# Allegro board OSCILLATOR.brd
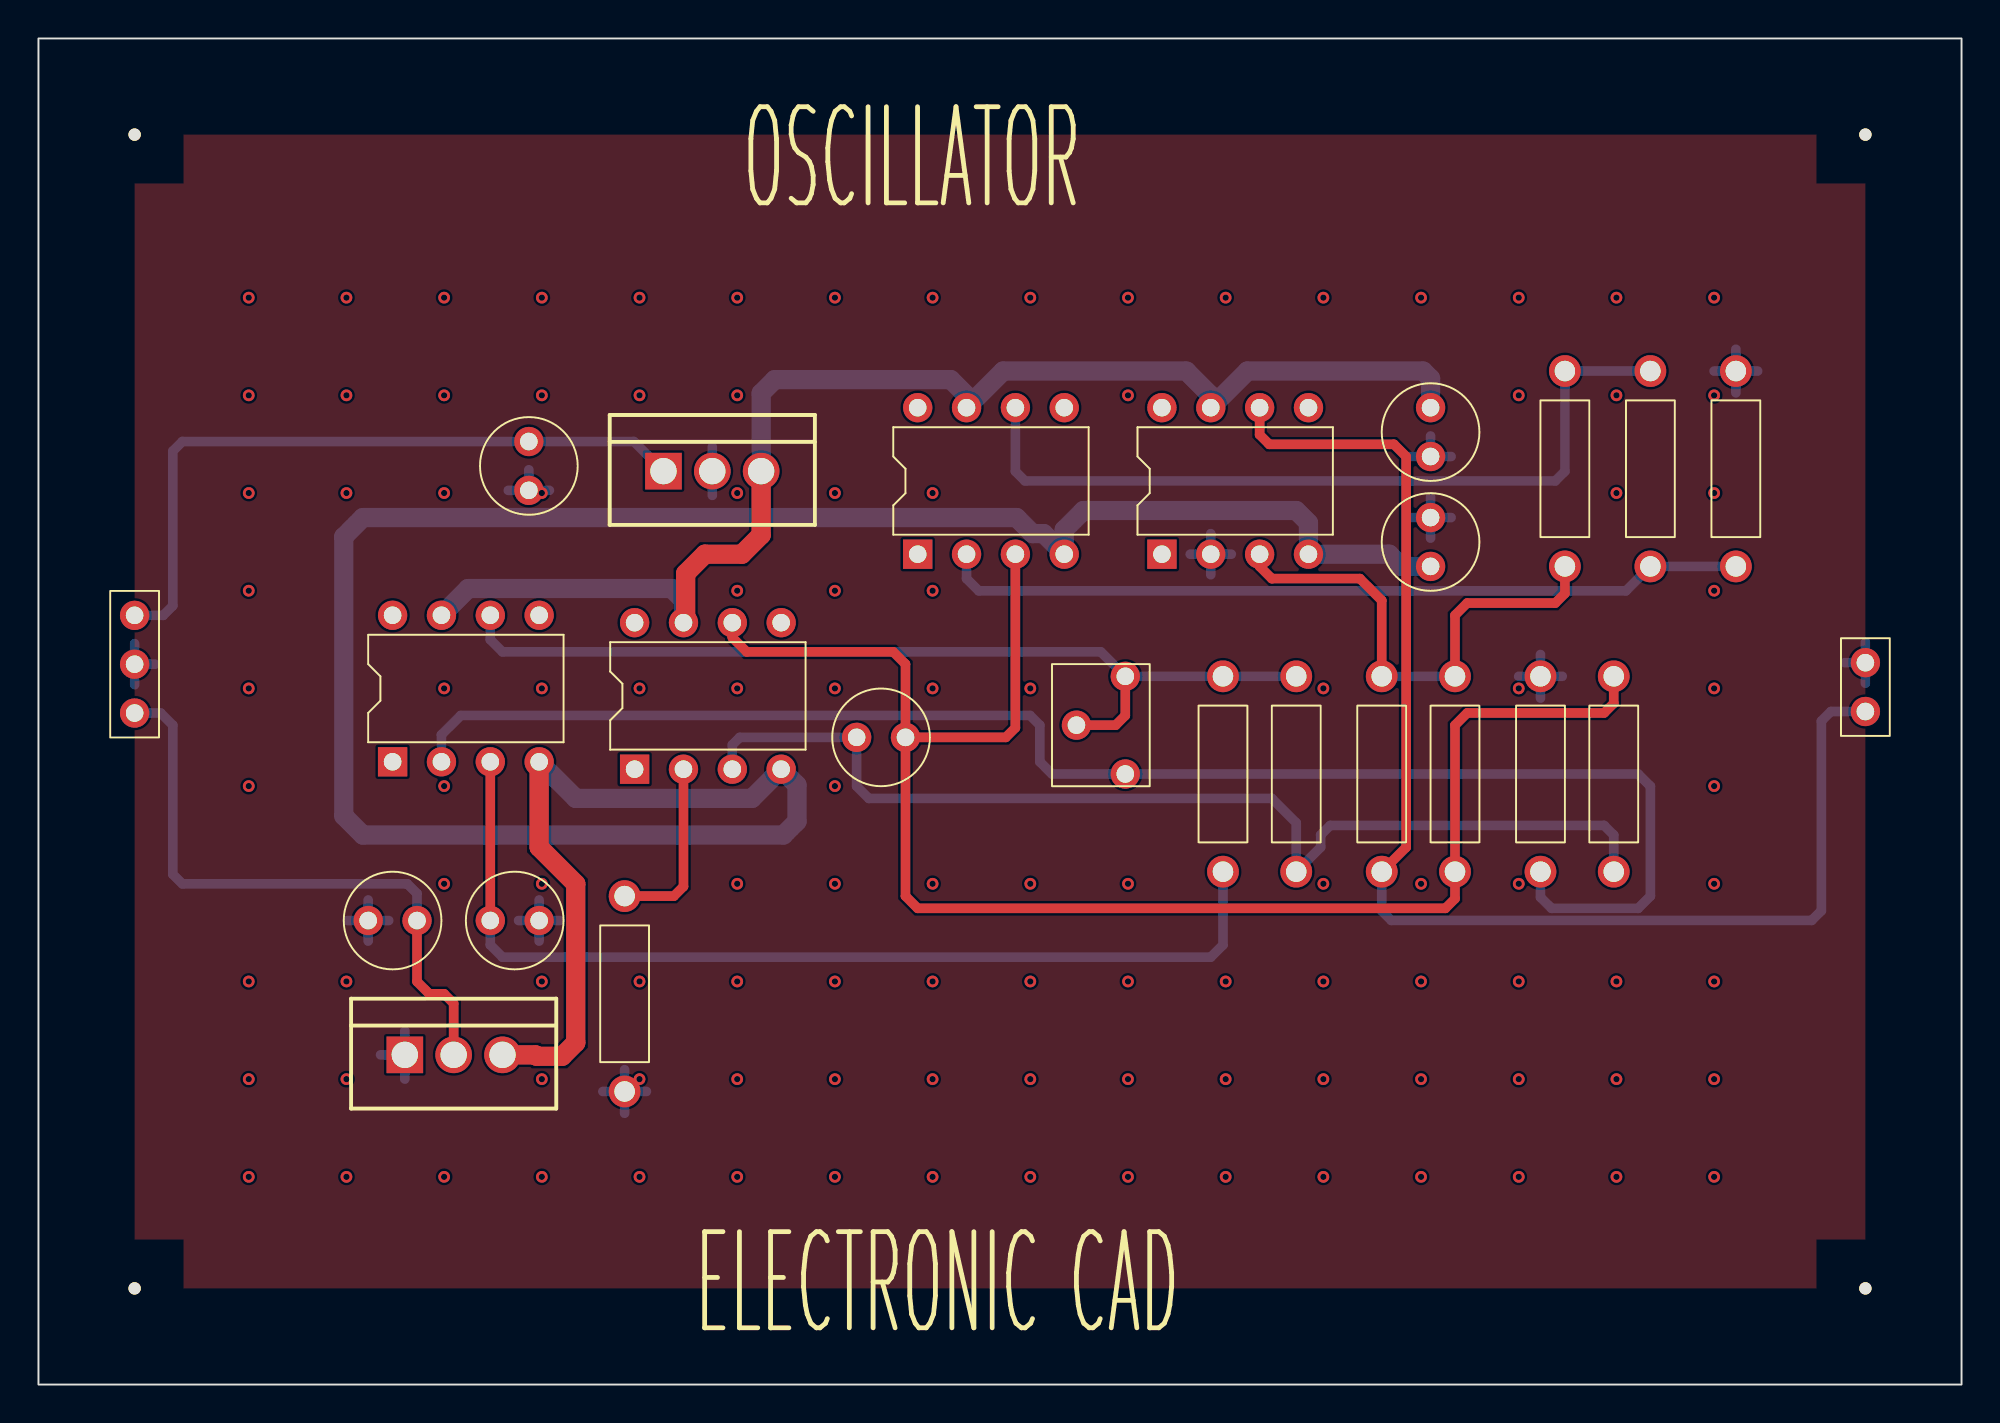
[diagram p0: board, top side]
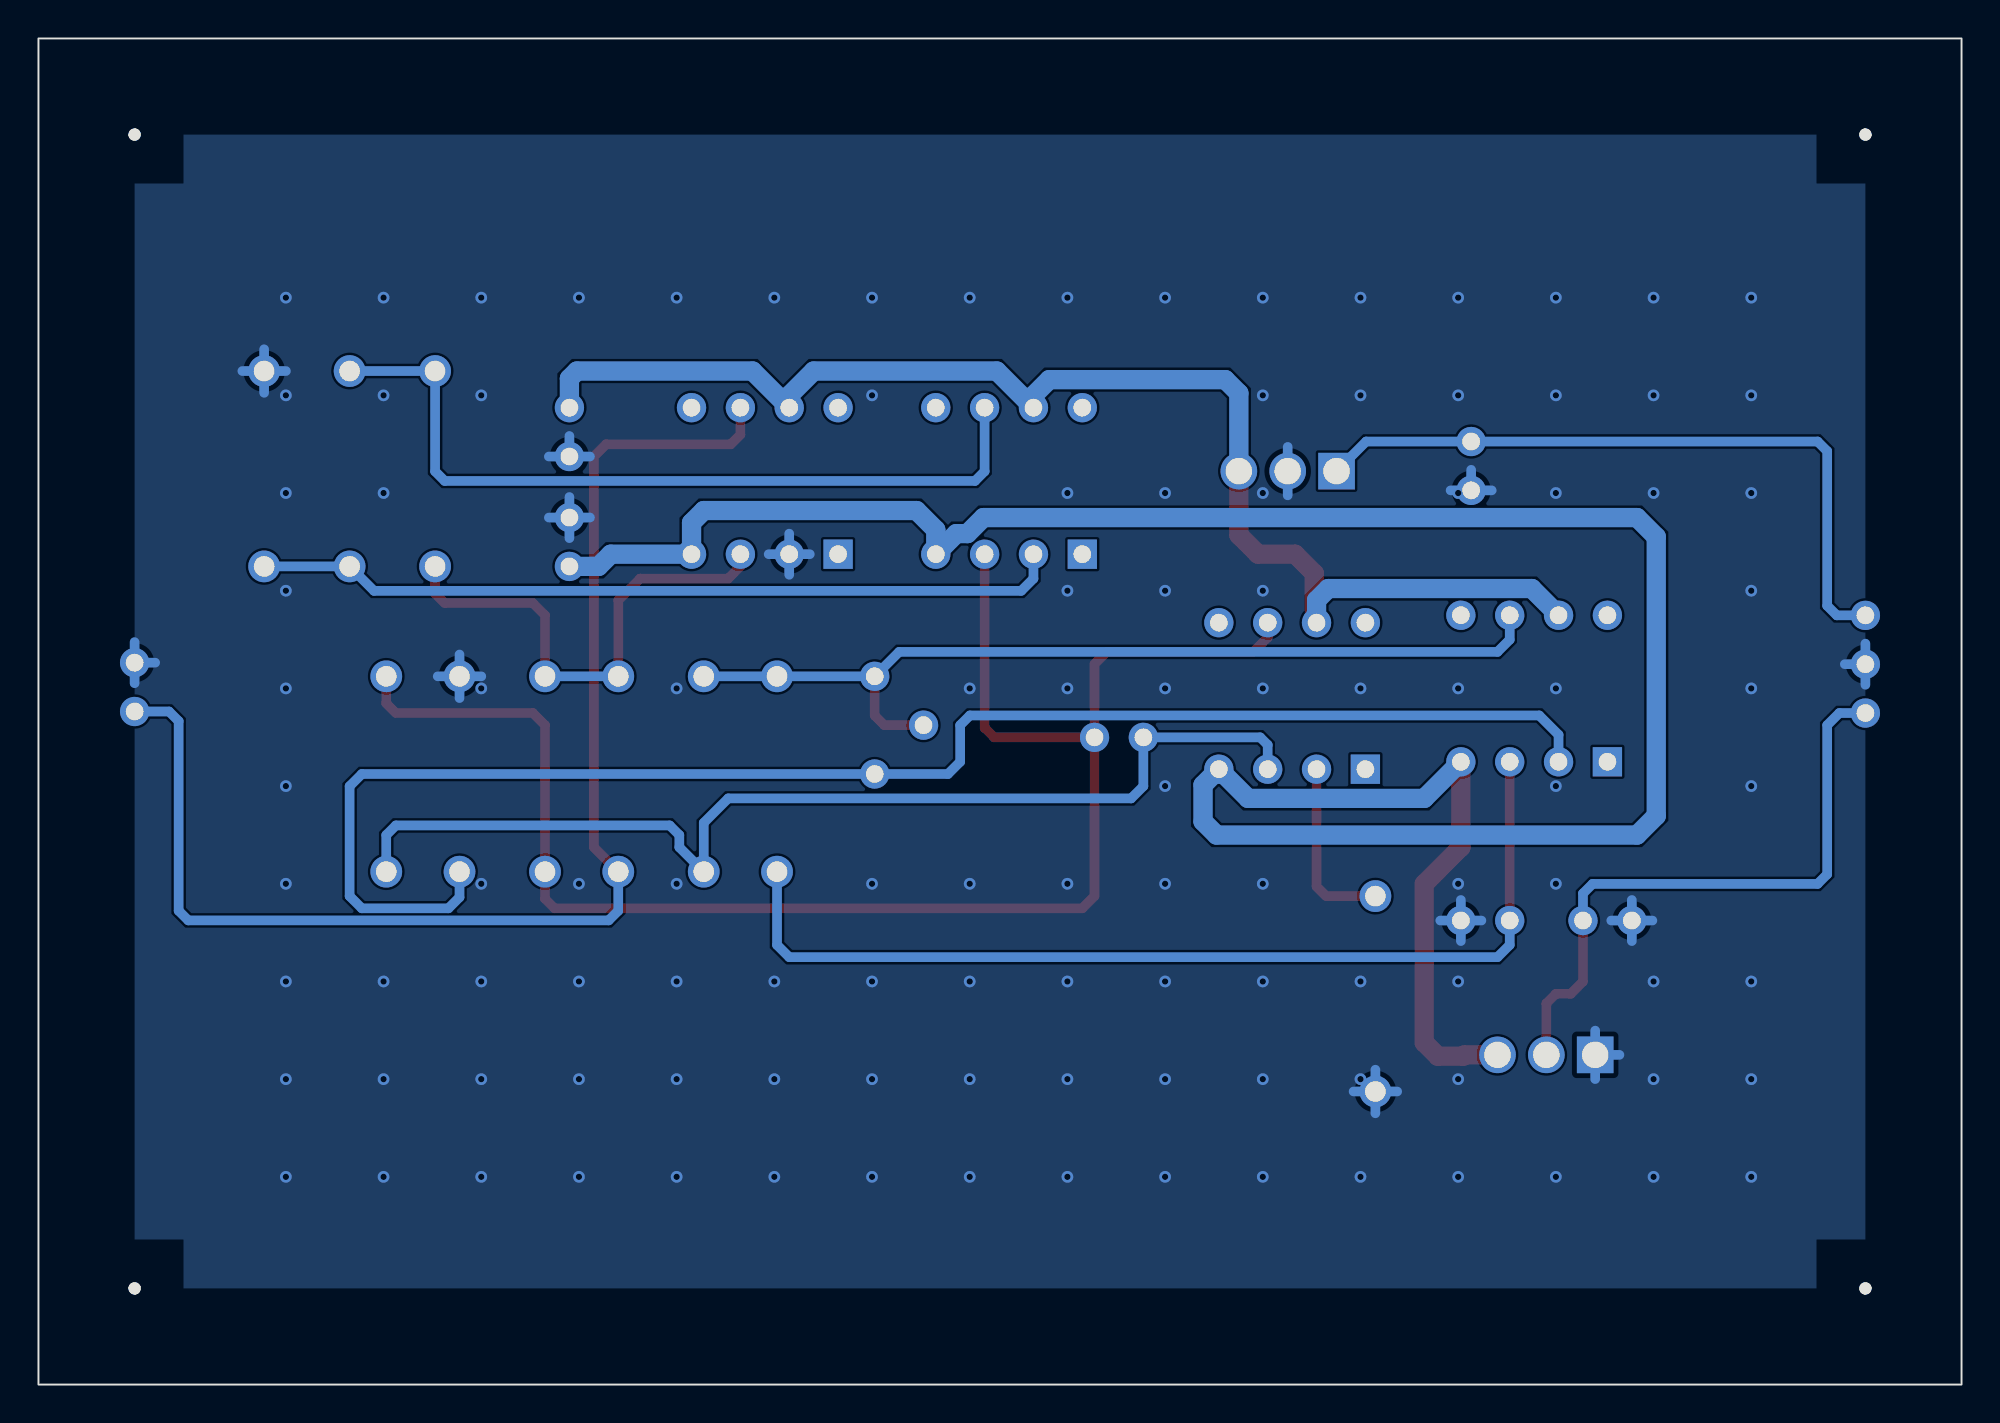
[diagram p1: board, bottom side, seen from below]

Outline 100 x 70 mm; copper layers: TOP, BOTTOM. Coordinates in mm from the lower left corner of the outline.
Outline path: rectangle 0,0 100,70

## Design rules (mm)
constraint set DEFAULT: min track width 0.5
nets with their own width: min track width 1; nets +VCC -VCC GND

## Placement (name value [footprint] x y rotation side)
C1  0.001uF  [CAP196]  42.55 33.66 270 top
C2  270pF  [CAP196]  26.04 24.13 90 top
C3  0.1uF  [CAP196]  25.5 46.5 0 top
C4  0.1uF  [CAP196]  72.39 48.26 0 top
C5  0.1uF  [CAP196]  19.68 24.13 90 top
C6  0.1uF  [CAP196]  72.39 42.55 0 top
J1  CON2  [JUMPER2]  95 35 90 top
J2  CON3  [JUMPER3]  5 40 270 top
NOREF  -  []  0 0 90 top
NOREF#2  -  [unnamed#2]  5 5 0 top
NOREF#3  -  []  5 5 90 top
NOREF#4  -  []  0 70 0 top
NOREF#5  -  [unnamed#2]  95 65 0 top
NOREF#6  -  [unnamed#2]  95 5 0 top
NOREF#7  -  [unnamed#2]  5 65 0 top
NOREF#8  -  []  95 5 90 top
R1  10K  [RES400]  61.59 26.67 0 top
R2  100K  [RES400]  81.92 26.67 0 top
R3  10K  [RES400]  73.66 26.67 0 top
R4  10K  [RES400]  69.85 36.83 180 top
R5  82K  [RES400]  65.41 36.83 180 top
R6  10K  [RES400]  30.48 15.24 0 top
R7  10K  [RES400]  79.38 42.55 0 top
R8  10K  [RES400]  78.11 26.67 0 top
R9  10K  [RES400]  83.82 42.55 0 top
R10  10K  [RES400]  88.27 52.7 180 top
U1  LF351  [DIP8_3]  18.41 32.38 90 top
U2  LF351  [DIP8_3]  31 32 90 top
U3  LF351  [DIP8_3]  45.72 43.18 90 top
U4  LF351  [DIP8_3]  58.42 43.18 90 top
U5  LM7812C  [TO220AB]  32.5 47.5 0 top
U6  LM7912C  [TO220AB]  19.05 17.14 0 top
VR1  1M  [RESADJ]  56.52 36.83 0 top

## Library data of the parts
C1-C6 = CAP NP: Tolerance: ***; User Part Number: ***
J1 = CON2: User Part Number: ***
J2 = CON3: User Part Number: ***
R1-R10 = R: Tolerance: ***; User Part Number: ***
U1-U4 = LF351: Tolerance: ***; User Part Number: ***
U5 = LM7812C_3
U6 = LM7912C_1
VR1 = POT: Tolerance: ***; User Part Number: ***

## Footprints (pads in the part's own frame, mm; a bottom-side part is the same pattern mirrored in y, then rotated)
CAP196
  round 1.524 hole 0.914: 1(0,0) 2(0,2.54)
DIP8_3
  rect 1.524x1.524 hole 0.914: 1(0,0)
  round 1.524 hole 0.914: 2(0,-2.54) 3(0,-5.08) 4(0,-7.62) 5(7.62,-7.62) 6(7.62,-5.08) 7(7.62,-2.54) 8(7.62,0)
JUMPER2
  round 1.524 hole 0.914: 1(0,0) 2(2.54,0)
JUMPER3
  round 1.524 hole 0.914: 1(0,0) 2(2.54,0) 3(5.08,0)
RES400
  round 1.651 hole 1.067: 1(0,0) 2(0,10.16)
RESADJ
  round 1.524 hole 0.914: 1(0,0) 2(-2.54,-2.54) 3(0,-5.08)
TO220AB
  rect 1.905x1.905 hole 1.372: 1(0,0)
  round 1.905 hole 1.372: 2(2.54,0) 3(5.08,0)
unnamed#2
  round 0.635 hole 3.175 unplated: (0,0)

## Nets
+VCC: C4.2 U1.7 U2.7 U3.7 U4.7 U5.3(VOUT)
-VCC: C6.1 U1.4(V-) U2.4(V-) U3.4(V-) U4.4(V-) U6.3(VOUT)
GND: C2.1 C3.1 C4.1 C5.2 C6.2 J1.2 J2.2 R6.1 R8.2 R10.1 U4.2 U5.2 U6.1
OUT: J1.1 R4.2 U4.6
SIG: C1.2 R2.2 R3.1 U2.6 U3.3
N00353: C2.2 R1.1 U1.3
N00377: R8.1 U1.2 VR1.3
N00434: R1.2 R5.1 U1.6 VR1.1 VR1.2(WIPER)
N00690: C1.1 R2.1 R5.2 U2.3
N00694: R6.2 U2.2
N00977: R7.2 R9.2 U3.6
N00981: R3.2 R4.1 R7.1 U4.3
N01016: R9.1 R10.2 U3.2
N01543: C3.2 J2.1 U5.1
N01588: C5.1 J2.3 U6.2

Pads without a net: U1 1 5 8; U2 1 5 8; U3 1 5 8; U4 1 5 8

## Via types
v1: diameter 0.61, hole 0.33, TOP to BOTTOM, 112 vias

## Routing (per net, layer and track width the routed paths; a pad name or vN(x,y) marks a point on that pad's centre or on a via; arc(x,y) is an arc through that point)
+VCC: length 69.8
  TOP w1: U2.7 33.66,39.73 33.66,42.18 34.66,43.18 36.58,43.18 37.58,44.18 U5.3
  BOTTOM w1: U5.3 37.58,51.55 38.29,52.26 47.44,52.26 48.26,51.44 U3.7 50.16,52.7 59.69,52.7 60.96,51.44 U4.7 62.87,52.7 72,52.7 72.39,52.32 C4.2 ; U2.7 33.54,40.78 32.93,41.39 22.34,41.39 U1.7
-VCC: length 136.9
  TOP w1: U6.3 25.84,17.14 25.91,17.07 27.23,17.07 27.94,17.78 27.94,26.04 26.04,27.94 U1.4
  BOTTOM w1: C6.1 70.87,42.55 70.24,43.18 U4.4 66.04,44.81 65.41,45.45 54.34,45.45 53.34,44.45 U3.4 52.27,44.25 51.69,44.25 50.86,45.09 16.88,45.09 15.88,44.09 15.88,29.57 16.88,28.57 38.73,28.57 39.44,29.28 39.44,31.18 U2.4 37.1,30.48 27.94,30.48 U1.4
GND: length 49.8
  BOTTOM w0.5: R6.1 30.48,16.37 ; R6.1 31.61,15.24 ; R6.1 30.48,14.11 ; R6.1 29.35,15.24 ; C6.2 72.39,46.15 ; C6.2 72.39,44.02 ; C6.2 73.46,45.09 ; C6.2 71.32,45.09 ; 17.14,23.06 C5.2 ; C5.2 16.08,24.13 ; C5.2 18.21,24.13 ; C5.2 17.14,25.2 ; J1.2 95,38.61 ; J1.2 95,36.47 ; J1.2 93.93,37.54 ; 87.13,52.7 R10.1 ; R10.1 89.4,52.7 ; R10.1 88.27,51.57 ; R10.1 88.27,53.84 ; 76.97,36.83 R8.2 ; R8.2 78.11,37.96 ; R8.2 79.24,36.83 ; R8.2 78.11,35.7 ; C3.1 26.57,46.5 ; C3.1 25.5,47.57 ; C3.1 24.43,46.5 ; C4.1 72.39,49.33 ; C4.1 73.46,48.26 ; C4.1 71.32,48.26 ; 35.04,46.24 U5.2 35.04,48.76 ; J2.2 6.07,37.46 ; J2.2 5,38.53 ; J2.2 5,36.39 ; U6.1 19.05,18.41 ; U6.1 19.05,15.88 ; U6.1 17.79,17.14 ; 26.04,23.06 C2.1 ; C2.1 24.97,24.13 ; C2.1 26.04,25.2 ; C2.1 27.1,24.13 ; 59.89,43.18 U4.2 ; U4.2 60.96,42.11 ; U4.2 60.96,44.25 ; U4.2 62.03,43.18
  vias: v1(10.94,56.52) v1(10.94,51.44) v1(10.94,46.36) v1(10.94,41.28) v1(10.94,36.2) v1(10.94,31.12) v1(10.94,20.96) v1(10.94,15.88) v1(10.94,10.8) v1(16.02,56.52) v1(16.02,51.44) v1(16.02,46.36) v1(16.02,20.96) v1(16.02,15.88) v1(16.02,10.8) v1(21.09,56.52) v1(21.09,51.44) v1(21.09,46.36) v1(21.09,36.2) v1(21.09,31.12) v1(21.09,26.04) v1(21.09,10.8) v1(26.18,56.52) v1(26.18,51.44) v1(26.18,46.36) v1(26.18,36.2) v1(26.18,26.04) v1(26.18,20.96) v1(26.18,15.88) v1(26.18,10.8) v1(31.25,56.52) v1(31.25,51.44) v1(31.25,36.2) v1(31.25,20.96) v1(31.25,15.88) v1(31.25,10.8) v1(36.34,56.52) v1(36.34,51.44) v1(36.34,46.36) v1(36.34,41.28) v1(36.34,36.2) v1(36.34,26.04) v1(36.34,20.96) v1(36.34,15.88) v1(36.34,10.8) v1(41.41,56.52) v1(41.41,46.36) v1(41.41,41.28) v1(41.41,36.2) v1(41.41,31.12) v1(41.41,26.04) v1(41.41,20.96) v1(41.41,15.88) v1(41.41,10.8) v1(46.49,56.52) v1(46.49,46.36) v1(46.49,41.28) v1(46.49,36.2) v1(46.49,26.04) v1(46.49,20.96) v1(46.49,15.88) v1(46.49,10.8) v1(51.58,56.52) v1(51.58,36.2) v1(51.58,26.04) v1(51.58,20.96) v1(51.58,15.88) v1(51.58,10.8) v1(56.66,56.52) v1(56.66,51.44) v1(56.66,26.04) v1(56.66,20.96) v1(56.66,15.88) v1(56.66,10.8) v1(61.73,56.52) v1(61.73,20.96) v1(61.73,15.88) v1(61.73,10.8) v1(66.81,56.52) v1(66.81,36.2) v1(66.81,26.04) v1(66.81,20.96) v1(66.81,15.88) v1(66.81,10.8) v1(71.89,56.52) v1(71.89,26.04) v1(71.89,20.96) v1(71.89,15.88) v1(71.89,10.8) v1(76.97,56.52) v1(76.97,51.44) v1(76.97,36.2) v1(76.97,26.04) v1(76.97,20.96) v1(76.97,15.88) v1(76.97,10.8) v1(82.06,56.52) v1(82.06,51.44) v1(82.06,46.36) v1(82.06,20.96) v1(82.06,15.88) v1(82.06,10.8) v1(87.14,56.52) v1(87.14,51.44) v1(87.14,46.36) v1(87.14,41.28) v1(87.14,36.2) v1(87.14,31.12) v1(87.14,26.04) v1(87.14,20.96) v1(87.14,15.88) v1(87.14,10.8)
OUT: length 69.3
  TOP w0.5: R4.2 71.12,27.94 71.12,48.26 70.48,48.9 64,48.9 63.5,49.4 U4.6
  BOTTOM w0.5: J1.1 93.21,35 92.71,34.5 92.71,24.64 92.21,24.14 70.35,24.14 69.85,24.64 R4.2
SIG: length 85.6
  TOP w0.5: C1.2 45.09,25.4 45.72,24.77 73.16,24.77 73.66,25.27 R3.1 73.66,34.29 74.3,34.92 81.42,34.92 81.92,35.42 R2.2 ; C1.2 50.3,33.66 50.8,34.16 U3.3 ; C1.2 45.09,37.47 44.45,38.1 36.83,38.1 36.08,38.85 U2.6
N00353: length 52
  TOP w0.5: 23.5,32.38 C2.2
  BOTTOM w0.5: R1.1 61.59,22.86 60.96,22.23 24.13,22.23 23.5,22.86 C2.2
N00377: length 80.6
  BOTTOM w0.5: U1.2 20.95,33.79 21.96,34.79 51.57,34.79 52.07,34.29 52.07,32.38 52.7,31.75 VR1.3 83.19,31.75 83.82,31.11 83.82,25.4 83.19,24.77 78.68,24.77 78.11,25.34 R8.1
N00434: length 48.8
  TOP w0.5: VR1.2 56.02,34.29 56.52,34.79 VR1.1
  BOTTOM w0.5: 23.5,40.01 23.5,38.73 24.13,38.1 55.24,38.1 VR1.1 R1.2 R5.1
N00690: length 56.6
  BOTTOM w0.5: U2.3 36.08,33.27 36.47,33.66 C1.1 42.55,31.11 43.18,30.48 64.14,30.48 65.41,29.21 R5.2 66.67,27.94 66.67,28.57 67.17,29.07 81.42,29.07 81.92,28.57 R2.1
N00694: length 9.4
  TOP w0.5: R6.2 33.04,25.4 33.54,25.9 U2.2
N00977: length 42
  BOTTOM w0.5: R9.2 R7.2 79.38,47.49 78.88,46.99 51.3,46.99 50.8,47.49 U3.6
N00981: length 26.2
  TOP w0.5: R7.1 79.38,41.14 78.88,40.64 74.3,40.64 73.66,40.01 R3.2 ; U4.3 63.5,42.55 64.14,41.91 68.72,41.91 69.85,40.77 R4.1
  BOTTOM w0.5: R4.1 R3.2
N01016: length 42.1
  BOTTOM w0.5: U3.2 48.26,41.91 48.9,41.27 82.55,41.27 R9.1 R10.2
N01543: length 36.6
  BOTTOM w0.5: J2.1 6.49,40 6.99,40.5 6.99,48.54 7.49,49.04 C3.2 30.96,49.04 U5.1
N01588: length 32.7
  TOP w0.5: U6.2 21.59,19.82 21.09,20.32 20.32,20.32 19.68,20.95 C5.1
  BOTTOM w0.5: C5.1 19.68,25.54 19.18,26.04 7.49,26.04 6.99,26.54 6.99,34.29 6.36,34.92 J2.3

## Copper pours and planes (outline as drawn; the poured copper is in the pictures)
GND on BOTTOM: 95,5 95,65 5,65 5,5 ; 1 cut-out
Net_1 on TOP: 95,5 95,65 5,65 5,5

## Text on the board
Ref Des/Silkscreen Top: ELECTRONIC CAD | OSCILLATOR
DIMENSION: FIGURE | FINISHED_SIZE | 0.914 | 1.067 | 1.372 | 3.175 | DRILL CHART: TOP to BOTTOM | ALL UNITS ARE IN MILLIMETERS | PLATED | NON-PLATED | QTY | 52 | 20 | 6 | 4
